# Altium PCB CAN_faceplate.PcbDoc
Units mm, origin at the board's own origin, x right, y up, seen from the top; angles counter-clockwise.
Board outline 60 x 22.7 mm, 2 copper layers (Top Layer, Bottom Layer); 1 components, 0 nets, 0 pads, 0 vias.
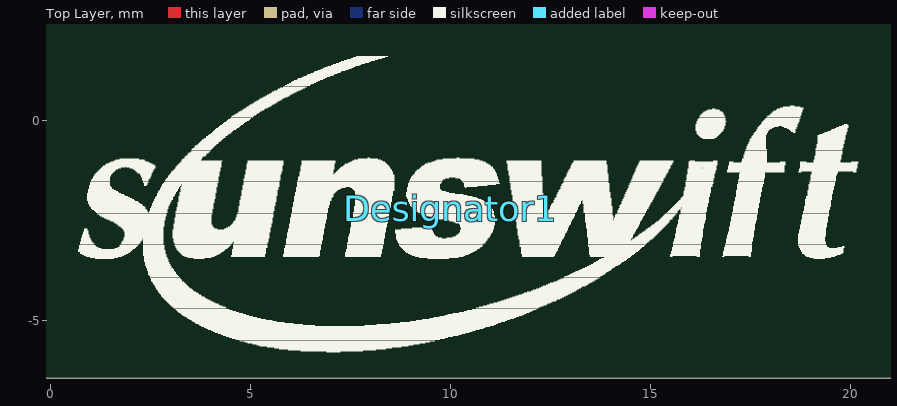
[diagram p0: Top Layer view]
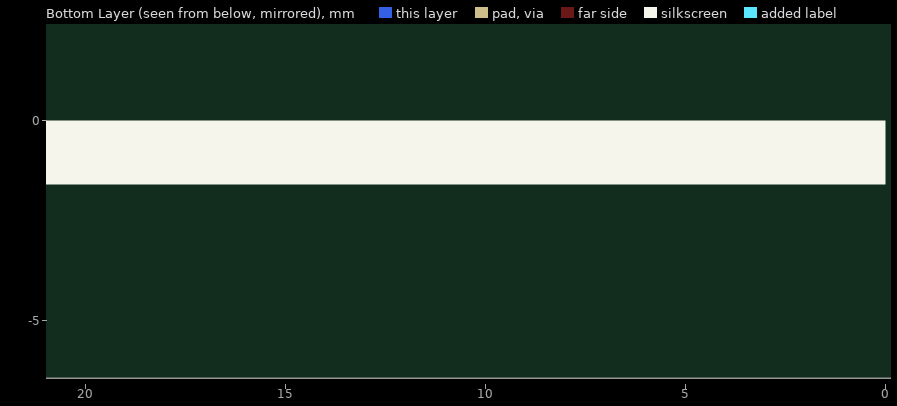
[diagram p1: Bottom Layer view, seen from below]

## Layer stack, top to bottom
Top Layer: signal copper 0.0356
Dielectric: dielectric 0.32, FR-4, Dk 4.8
Bottom Layer: signal copper 0.0356

## Board outline
-1.7,-6.45 -1.7,16.25 58.295,16.25 58.3,-6.45

## Design rules (kind name [scope] priority, off if disabled: settings)
Clearance [All] p1: gap=0.254
PolygonConnect [All] p1: connectstyle=Relief reliefconductorwidth=0.254 reliefentries=4 polygonreliefangle="90 Angle"
RoutingVias [All] p1: holewidth=0.711 width=1.27 viastyle="Through Hole" minholewidth=0.711 minwidth=1.27 maxholewidth=0.711 maxwidth=1.27
SilkscreenOverComponentPads [All] p1: minsilkscreentomaskgap=0.254
SolderMaskExpansion [All] p1: expansion=0.102
TestPointUsage [All] p1: valid=0 allowmultiple=FALSE
Testpoint [All] p1: side=3 testpointundercomponent=TRUE minsize=1.016 maxsize=2.54 preferedsize=1.524 minholesize=0 maxholesize=1.016 preferedholesize=0.813 testpointgrid=0.025 style=297 order=0123456789
Width [All] p1: maxlimit=0.254 minlimit=0.254 preferedwidth=0.254
23 further rules are at their usual default settings.

## Components (designator, comment, footprint, x,y, rotation, side; value= is the part's Value field where it differs from the comment)
Designator1 "Comment" SUNSWIFTLOGO 10,-2.2 r0 top

## Footprints (in the part's own frame and the unit in brackets; to place one, negate y for a bottom-side part, rotate by r counter-clockwise, add the part's x,y. Pads: shape width x height; smd on the part's side, far side on the other; paste and mask are expansions set on the pad)
SUNSWIFTLOGO [mm] "Sunswift Logo"
  silkscreen extent -9.32,-3.58 10.19,3.81

## Nets (pads, with @x,y where several pads share a name; then routed paths per layer and width w, separated by ;. In a path a pad name is that pad's centre, name@x,y a point inside that pad or via, vN(x,y) a via of type N, cw(c..) or ccw(c..) an arc to the next point about the centre after c; other vN are vias at no path point)

## Silkscreen, mask and mechanical layers (free items; w line width, h text height)
Top Overlay:
  rectangle: 50.3,6.1 57.55,9.1
  rectangle: 50.3,11.3 57.55,14.3
  text "POWER" at 50.5,1.7 h1.4
  text "BMS Master" at 24.9,-3.6 h3
Bottom Overlay:
  rectangle: 0,-1.6 56.6,0
  text "CAN END" at 9.9,13.4 h1.52
  text "PANEL" at 6.7,10.3 h1.52
  text "THIS" at 6.4,7 h1.52
  text "SIDE IN" at 8.7,3.7 h1.52
  text "SUITS HAMMOND MFG 1593L   DF, GS, 2011" at 56.6,-4.5 h1.52
Mechanical 1:
  circle w0.254: c34.9,8 r6.6
  circle w0.254: c48.56,12.7 r1.6
  circle w0.254: c48.56,7.62 r1.6
  circle w0.254: c48.56,2.54 r1.6
  circle w0.254: c15.2,8 r6.6
  lines w0.254: -1.7,-6.45 -1.7,16.25 31.31,16.25 58.3,16.25 58.3,-6.45 -1.7,-6.45